# Altium PCB main.PcbDoc
Units mm, origin at the board's own origin, x right, y up, seen from the top; angles counter-clockwise.
Board outline 95.5 x 60.57 mm, 4 copper layers (Digital Signal, Vcc, Ground, Analog Signal), stack 0.603 mm thick; 11 components, 16 nets, 90 pads, 0 vias.
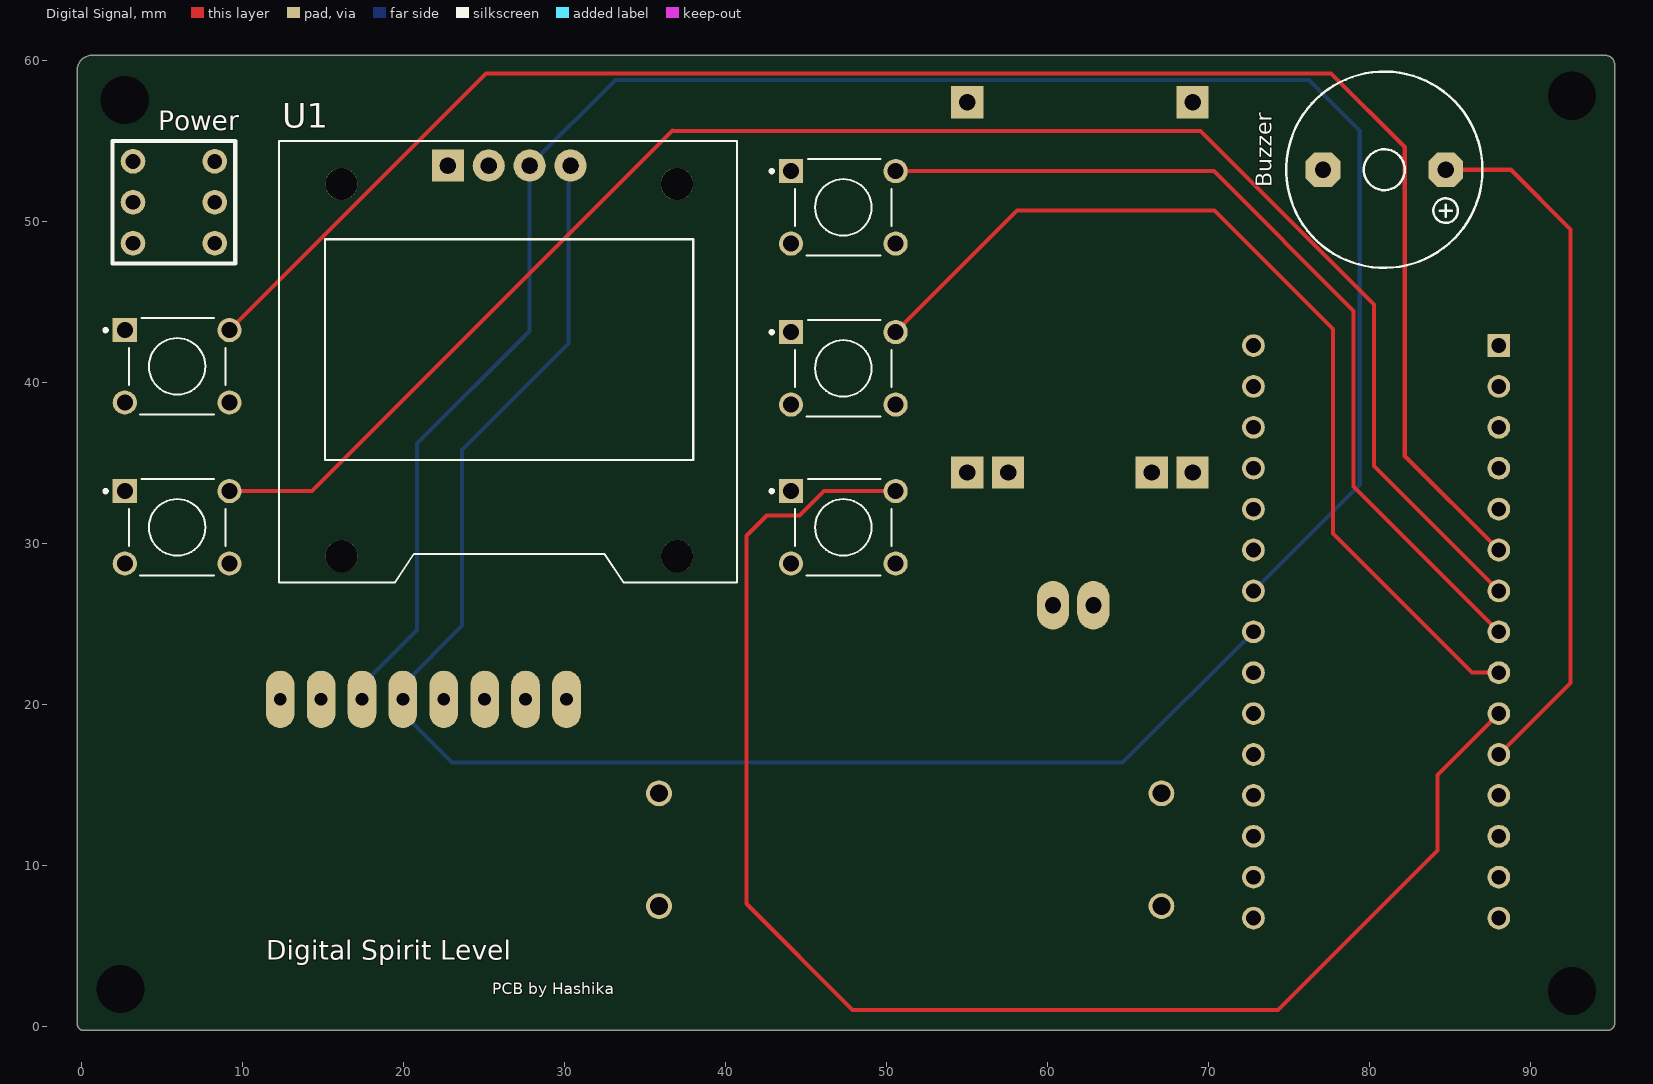
[diagram p0: Digital Signal view]
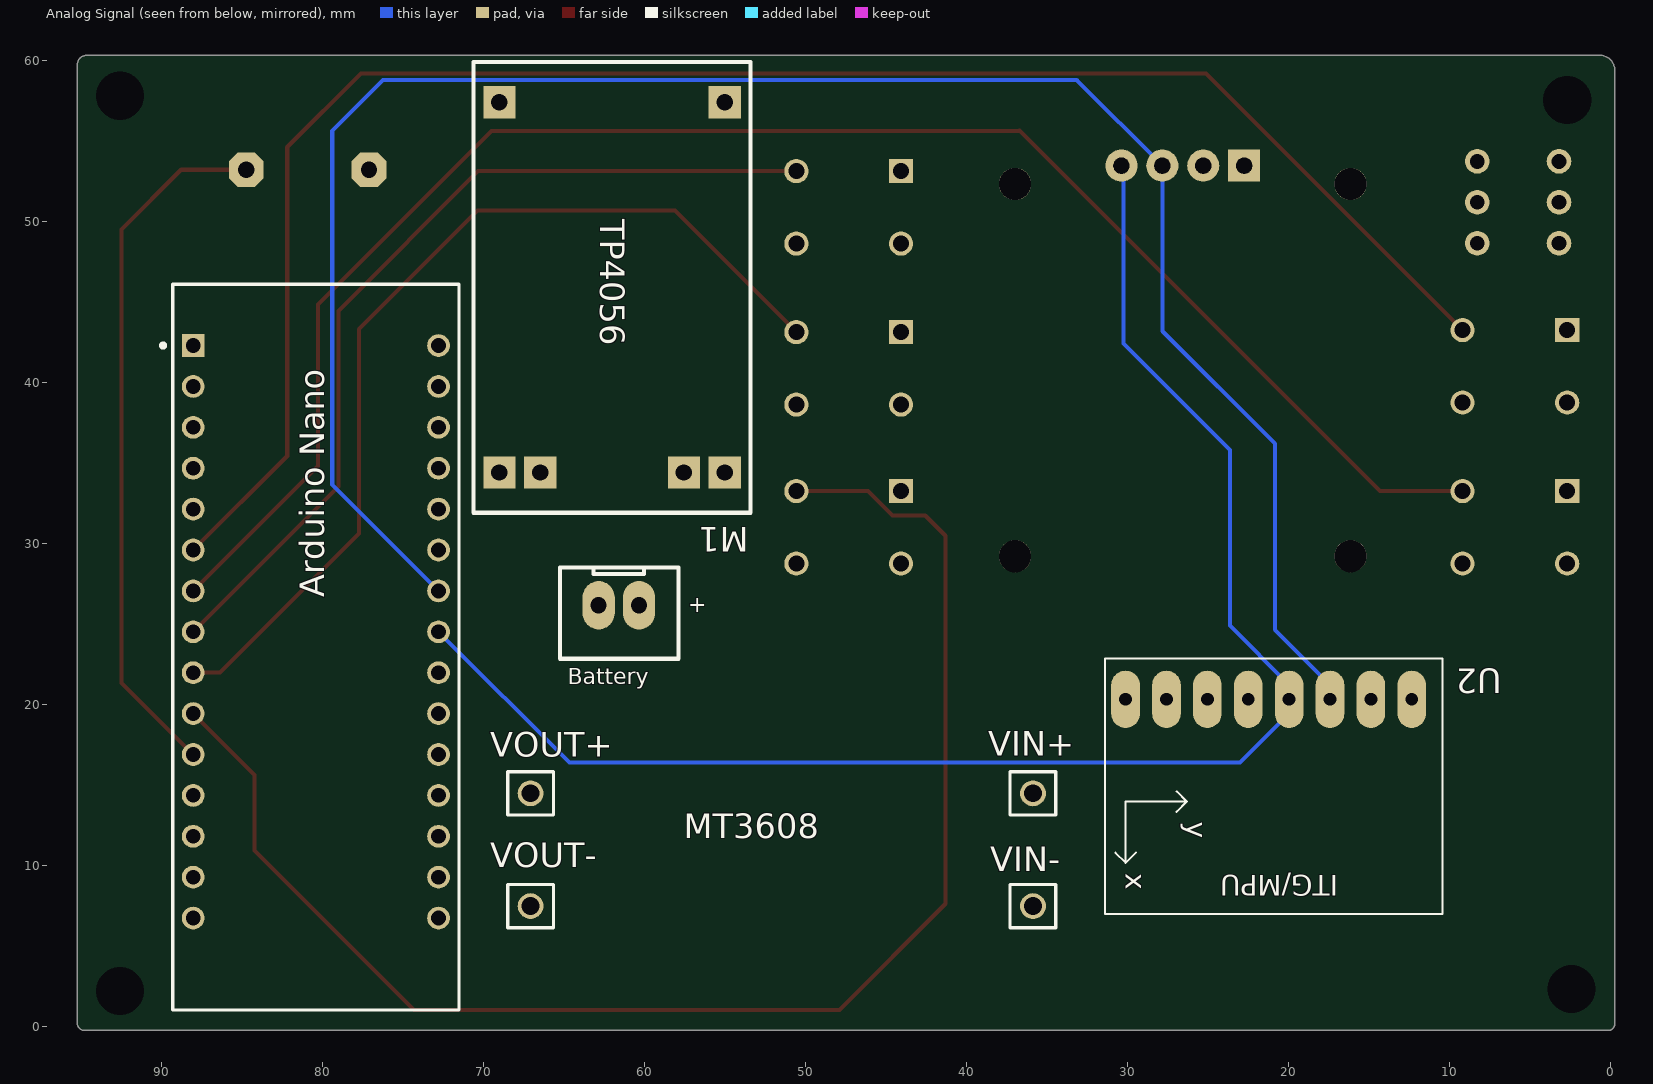
[diagram p1: Analog Signal view, seen from below]
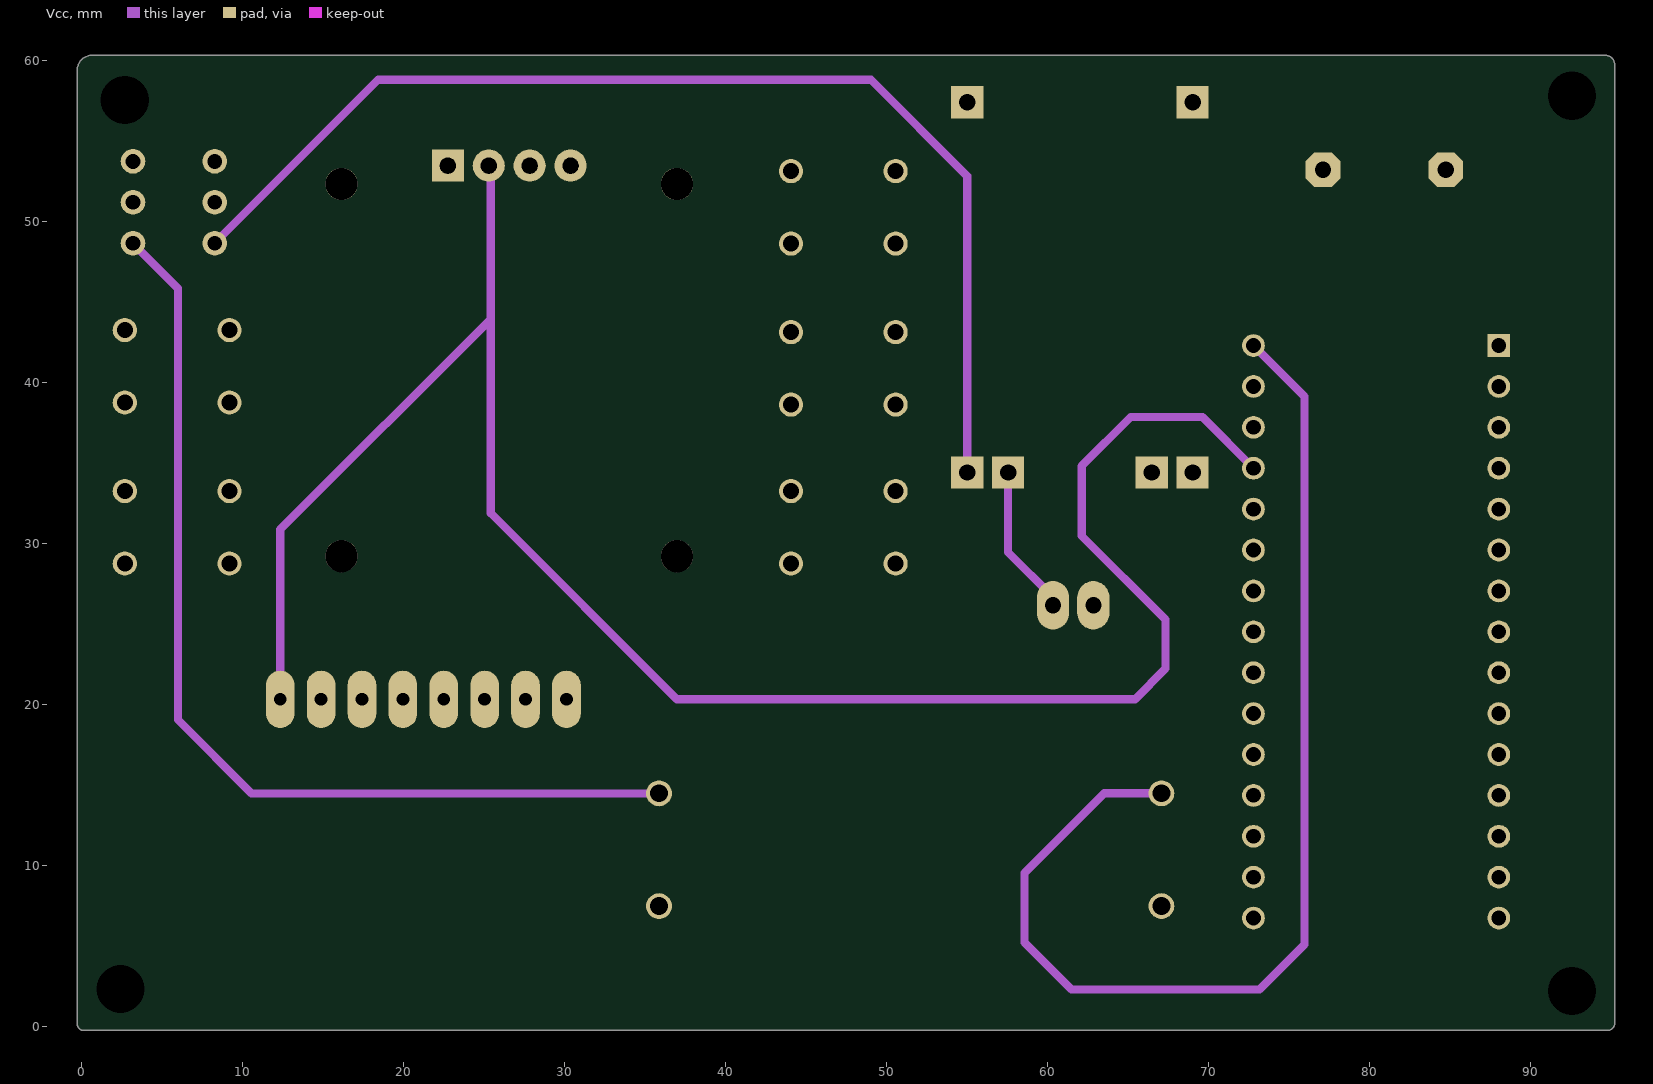
[diagram p2: Vcc]
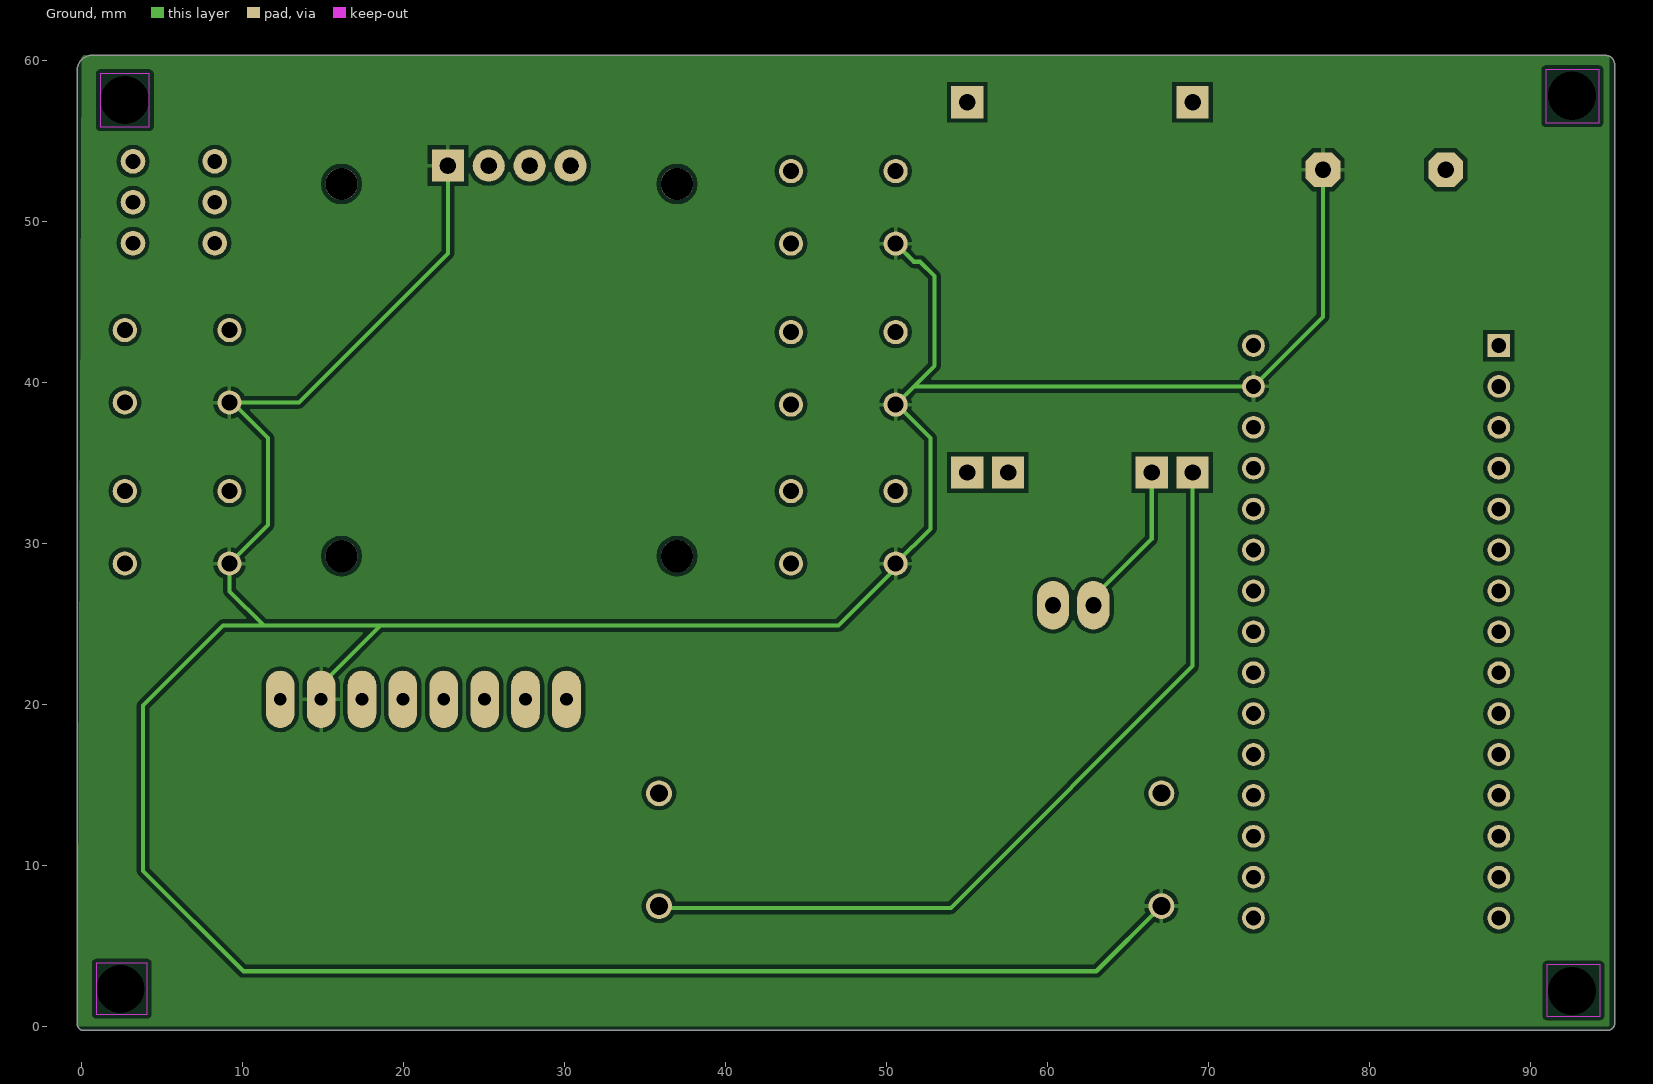
[diagram p3: Ground]
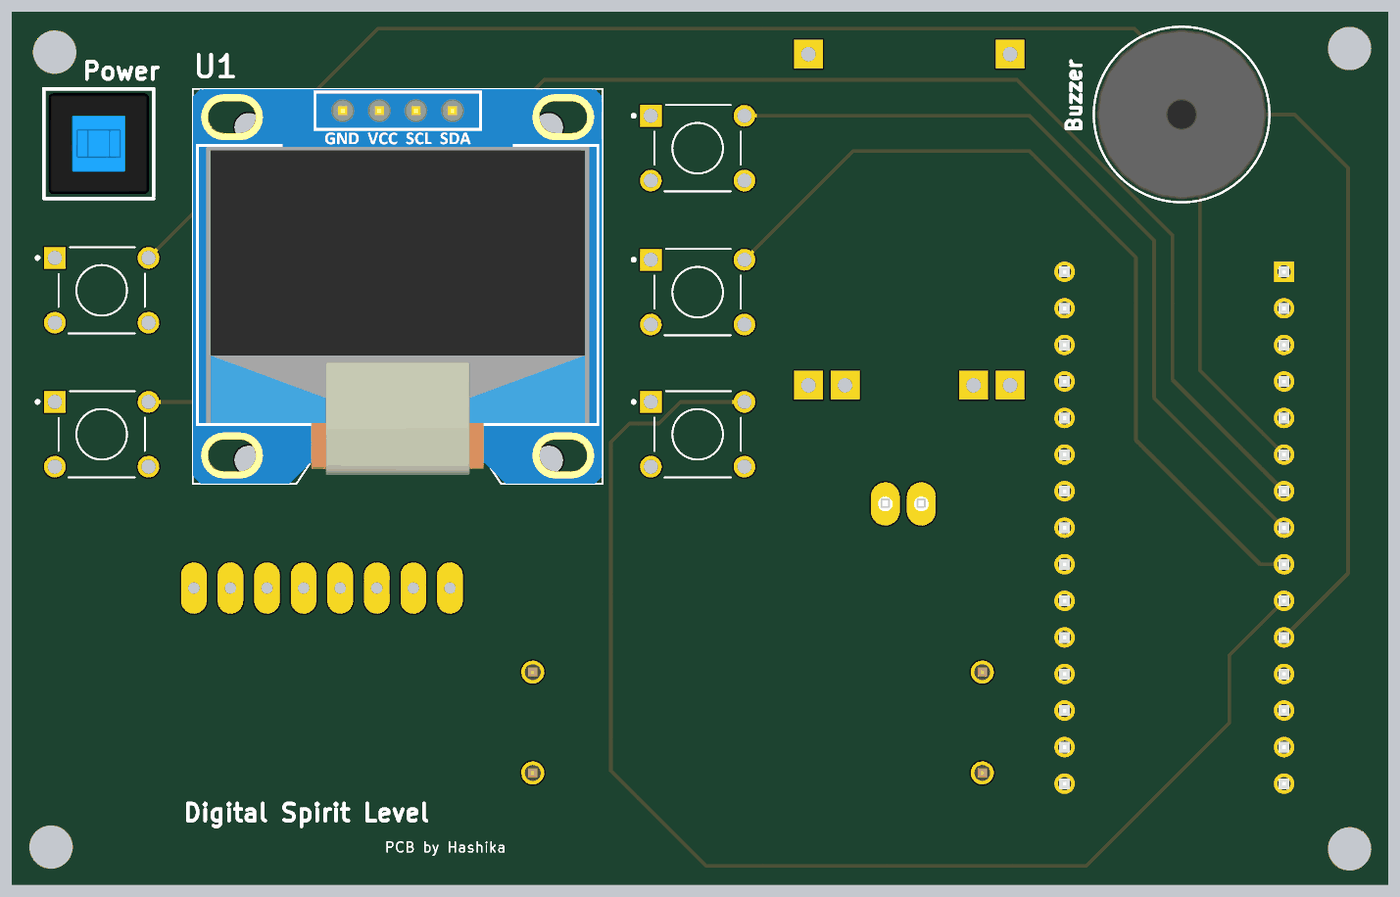
[diagram p4: 3D render of the assembled board from above, using the file's embedded part models]

## Layer stack, top to bottom
Top Solder: solder mask 0.0102, Solder Resist, Dk 3.5
Digital Signal: signal copper 0.0356
Dielectric 2: prepreg 0.0711, PP-006, Dk 4.1
Vcc: signal copper 0.035
Dielectric 1: dielectric 0.32, FR-4, Dk 4.8
Ground: signal copper 0.035
Dielectric 3: prepreg 0.0711, PP-006, Dk 4.1
Analog Signal: signal copper 0.0356
Bottom Solder: solder mask 0.0102, Solder Resist, Dk 3.5

## Board outline
0.122,-0.249 cw(c0.122,0.16) -0.287,0.16 -0.287,59.403 cw(c0.633,59.403) 0.633,60.323 94.617,60.323 cw(c94.617,59.726) 95.214,59.726 95.214,0.222 cw(c94.747,0.217) 94.752,-0.249

## Design rules (kind name [scope] priority, off if disabled: settings)
Clearance [All] p1: gap=0.254 ignorepadtopadclearanceinfootprint=FALSE except(0: Arc-Hole Track-Hole SMDPad-Hole THPad-Hole Via-Hole Fill-Hole Poly-Hole Region-Hole Text-Hole)
HoleSize [All] p1: absolutevalues=TRUE maxlimit=3.55 minlimit=0.025 maxpercent=80.000 minpercent=20.000
PolygonConnect [All] p1: connectstyle=Relief reliefconductorwidth=0.254 reliefentries=4 polygonreliefangle="90 Angle" airgapwidth=0.254
RoutingVias [All] p1: holewidth=0.711 width=1.27 viastyle="Through Hole" minholewidth=0.711 minwidth=1.27 maxholewidth=0.711 maxwidth=1.27
SilkToSolderMaskClearance [IsPad] p1: minsilkscreentomaskgap=0.237 clearancetoexposedcopper=TRUE
SolderMaskExpansion [All] p1: expansion=0.102 istentingtop=FALSE
Width [All] p1: maxlimit=0.508 minlimit=0.254 preferedwidth=0.508 toplayer_maxwidth=0.254 toplayer_prefwidth=0.254 midlayer1_minwidth=0.508 midlayer2_maxwidth=0.254 midlayer2_prefwidth=0.254 bottomlayer_maxwidth=0.254 bottomlayer_prefwidth=0.254 minimp=50.000000 maximp=50.000000 favimp=50.000000
28 further rules are at their usual default settings.

## Components (designator, comment, footprint, x,y, rotation, side; value= is the part's Value field where it differs from the comment)
"Arduino Nano" "A000005" FP-A000005-MFG 80.392,23.56 r180 bottom
Battery "JST_2" JST_2 57.831,22.855 r90 bottom (schematic designator J1)
Buzzer "Buzzer small" Buzzer 80.9,53.214 r180 top
M1 "TP4056Module" TP4056Module 70.592,59.905 r270 bottom
Power "BUTTON_6_8X8" BUTTON_6_8x8 9.526,55.001 r180 top
U1 "DISPLAY_OLED" DISPLAY_OLED 12.879,26.802 r0 top
U2 "GY-521" GY-521 21.209,11.43 r270 bottom
VIN+ "61300111121" 61300111121 35.849,14.476 r180 bottom
VIN- "61300111121" 61300111121 35.849,7.476 r180 bottom
VOUT+ "61300111121" 61300111121 67.057,14.479 r180 bottom
VOUT- "61300111121" 61300111121 67.057,7.479 r180 bottom

## Footprints (in the part's own frame and the unit in brackets; to place one, negate y for a bottom-side part, rotate by r counter-clockwise, add the part's x,y. Pads: shape width x height; smd on the part's side, far side on the other; paste and mask are expansions set on the pad)
61300111121 [mm] "Pin Header, pitch 2.54 mm, THT, Vertical, single row, 1p"
  round 1.6 hole 1.1: 1(0,0)
  silkscreen extent -1.42,-1.35 1.42,1.35, body extent -1.27,-1.27 1.27,1.27, height 8.57
BUTTON_6_8x8 [mil]
  round 60 hole 36: 1(50,50) 2(50,150) 3(50,250) 4(250,250) 5(250,150) 6(250,50)
  silkscreen extent 0,0 300,300, body extent 12,12 288,288, height 528
Buzzer [mil]
  oct 85x85 hole 40: +(-150,0) -(150,0)
  silkscreen extent -240,-240 240,240, body extent -232,-232 232,232, height 394
DISPLAY_OLED [mm]
  rect 2x2 hole 1: 1(9.856,26.666)
  round 2 hole 1: 2(12.396,26.666) 3(14.936,26.666) 4(17.476,26.666)
  round 2 hole 2 unplated: ""(3.252,2.409) ""(3.252,25.523) ""(24.08,2.409) ""(24.08,25.523)
  silkscreen extent -0.64,0.76 27.81,28.19, body extent -0.61,0.78 27.79,28.18, height 5.7
FP-A000005-MFG [mil]
  rect 55.67x55.67 hole 35.98 paste-39370.1 mask+0: 1(-300,737.5)
  round 55.67 hole 35.98 paste-39370.1 mask+0: 2(-300,637.5) 3(-300,537.5) 4(-300,437.5) 5(-300,337.5) 6(-300,237.5) 7(-300,137.5) 8(-300,37.5) 9(-300,-62.5) 10(-300,-162.5) 11(-300,-262.5) 12(-300,-362.5) 13(-300,-462.5) 14(-300,-562.5) 15(-300,-662.5) 16(300,-662.5) 17(300,-562.5) 18(300,-462.5) 19(300,-362.5) 20(300,-262.5) 21(300,-162.5) 22(300,-62.5) 23(300,37.5) 24(300,137.5) 25(300,237.5) 26(300,337.5) 27(300,437.5) 28(300,537.5) 29(300,637.5) 30(300,737.5)
  silkscreen extent -379,-888 350,888, body extent -354,-884 354,888, height 488
GY-521 [mil]
  oval 140x70 hole 31.5: ADO(-350,-250) GND(-350,250) INT(-350,-350) SCL(-350,150) SDA(-350,50) VCC(-350,350) XCL(-350,-150) XDA(-350,-50)
  silkscreen extent -450,-400 175,425
JST_2 [mm]
  oval 3x2 hole 1: 1(3.307,4.994) 2(3.307,2.494)
  silkscreen extent -0.02,0.04 5.66,7.41, body extent -0.02,0.04 5.73,7.44, height 7.05
TP4056Module [mm]
  rect 2x2 hole 1.016: 1(2.5,15.6) 2(2.5,1.6) 3(25.5,15.6) 4(25.5,13.06) 5(25.5,4.14) 6(25.5,1.6)
  silkscreen extent 0,0 28,17.2

## Part data
"Arduino Nano": library part CMP-189986-000002-1, "ARDUINO NANO ATMEGA328 EVAL BRD", Operating Supply Voltage=12V, Package Quantity=50, Core Architecture=AVR, Data Bus Width=8b, Evaluation Kit=Yes, Height=0.25inch, Interface=I2C, Length=7inch, Number of Bits=8, Packaging=Bulk, REACH SVHC="No SVHC", Series="AVR® ATmega", Weight=0.358383oz, Width=5inch
Buzzer: library part Buzzer, "5-12v small buzzer (12mm)"
M1: "TP4056 Module for managing battery charging"
U2: "Triple Axis Accelerometer Gyro Breakout", Package=Package, Availability="Not in stock", Check_prices=https://www.snapeda.com/parts/GY-521/GODREAM+FORDREAM+CO.%252C+LIMITED/view-part/?ref=eda, MF="GODREAM FORDREAM CO., LIMITED", MP=GY-521, Price=None, SnapEDA_Link=https://www.snapeda.com/parts/GY-521/GODREAM+FORDREAM+CO.%252C+LIMITED/view-part/?ref=snap
VIN+ VIN- VOUT+ VOUT-: library part CMP-1502-01058-1, "THT Vertical Pin Header WR-PHD, Pitch 2.54 mm, Single Row, 1 pins", Contact Resistance=20mOhm, Manufacturer="Wurth Elektronik", Operating Temperature=-40to105degC, Rated Current=3A, Withstanding Voltage=500VAC, Working Voltage=250VAC, Datasheet URL=https://katalog.we-online.de/em/datasheet/6130xx11121.pdf, Gender=Male, Manufacturer URL=http://www.we-online.de, Mounting Technology=THT, Orientation=Vertical, Package Reference=61300111121, Packaging=Bag, Part Number=61300111121, Pin Number=1, Pitch=2.54mm, Publisher=WurthElektronik, Row Number=Single

## Free pads (board coordinates)
  rect 1.498x1.498 / inner round 1.498 / far side rect 1.498x1.498 hole 0.99: 1(2.667,33.251) 1(2.667,43.251) 1(44.047,33.251) 1(44.047,43.124) 1(44.047,53.124)
  round 1.498 hole 0.99: 2(9.167,33.251) 2(9.167,43.251) 2(50.547,33.251) 2(50.547,43.124) 2(50.547,53.124) 3(2.667,28.751) 3(2.667,38.751) 3(44.047,28.751) 3(44.047,38.624) 3(44.047,48.624) 4(9.167,28.751) 4(9.167,38.751) 4(50.547,28.751) 4(50.547,38.624) 4(50.547,48.624)
  round 1.524 hole 3: 8(2.402,2.329) 8(2.655,57.547) 8(92.563,2.202) 8(92.563,57.801)

## Nets (pads, with @x,y where several pads share a name; then routed paths per layer and width w, separated by ;. In a path a pad name is that pad's centre, name@x,y a point inside that pad or via, vN(x,y) a via of type N, cw(c..) or ccw(c..) an arc to the next point about the centre after c; other vN are vias at no path point)
+5: "Arduino Nano.27" U1.2 U2.VCC | length 126.1
  Vcc w0.508: U2.VCC 12.319,30.861 25.4,43.942 ; U1.2 25.4,53.343 25.4,43.942 ; 72.772,34.672 69.599,37.846 65.151,37.846 62.103,34.798 62.103,30.48 67.31,25.273 67.31,22.225 65.405,20.32 36.957,20.32 25.4,31.877 25.4,43.942
GND: "Arduino Nano.29" Buzzer.- pad.4 U1.1 U2.GND VOUT-.1 | length 234.5
  Ground w0.254: pad.4@9.167,38.751 pad.4@9.36,38.751 ; pad.4@9.167,39.259 pad.4@9.414,39.259 ; U2.GND 14.859,21.209 18.542,24.892 ; U1.1 22.734,48.007 13.478,38.751 pad.4@9.36,38.751 ; pad.4@50.547,48.624 51.674,47.498 52.07,47.498 52.959,46.609 52.959,41.036 51.675,39.752 ; VOUT-.1 63.007,3.429 10.033,3.429 3.81,9.652 3.81,19.939 8.763,24.892 11.303,24.892 ; Buzzer.- 77.09,44.07 72.772,39.752 51.675,39.752 ; pad.4@9.36,38.751 11.557,36.554 11.557,31.141 9.167,28.751 9.167,27.028 11.303,24.892 ; 11.303,24.892 18.542,24.892 ; 18.542,24.892 46.99,24.892 50.547,28.449 50.547,28.751 52.705,30.909 52.705,36.554 50.635,38.624 50.547,38.624 51.675,39.752
"NetArduino Nano_6": "Arduino Nano.6" pad.2@9.167,43.251 | length 108.9
  Digital Signal w0.254: pad.2@9.167,43.251 25.098,59.182 77.6,59.182 82.17,54.611 82.17,35.434 88.012,29.592
"NetArduino Nano_7": "Arduino Nano.7" pad.2@9.167,33.251 | length 106.1
  Digital Signal w0.254: pad.2@9.167,33.251 14.285,33.251 36.681,55.648 36.703,55.626 69.472,55.626 80.265,44.832 80.265,34.799 88.012,27.052 ; pad.2@9.474,33.493 pad.2@9.625,33.644
"NetArduino Nano_8": "Arduino Nano.8" pad.2@50.547,53.124 | length 55.7
  Digital Signal w0.254: pad.2@50.547,53.124 70.32,53.124 78.994,44.45 78.994,33.531 88.012,24.512
"NetArduino Nano_9": "Arduino Nano.9" pad.2@50.547,43.124 | length 59.9
  Digital Signal w0.254: pad.2@50.547,43.124 58.096,50.673 70.358,50.673 77.724,43.307 77.724,30.607 86.359,21.972 88.012,21.972
"NetArduino Nano_10": "Arduino Nano.10" pad.2@50.547,33.251 | length 93.1
  Digital Signal w0.254: pad.2@50.547,33.251 46.084,33.251 44.58,31.747 42.542,31.747 41.275,30.48 41.275,7.62 47.879,1.016 74.295,1.016 84.201,10.922 84.201,15.621 88.012,19.432
"NetArduino Nano_11": "Arduino Nano.11" Buzzer.+ | length 43.7
  Digital Signal w0.254: Buzzer.+ 88.753,53.214 92.457,49.51 92.457,21.337 88.012,16.892
"NetArduino Nano_23": "Arduino Nano.23" U1.4 U2.SDA | length 95.8
  Analog Signal w0.254: U1.4 30.226,53.34 30.226,42.418 23.622,35.814 23.622,24.892 19.939,21.209 U2.SDA 19.939,19.431 22.987,16.383 64.643,16.383 72.772,24.512
"NetArduino Nano_24": "Arduino Nano.24" U1.3 U2.SCL | length 123.8
  Analog Signal w0.254: U2.SCL 17.399,21.209 20.828,24.638 20.828,36.195 27.814,43.181 U1.3 33.132,58.786 76.217,58.786 79.376,55.627 79.376,33.656 72.772,27.052
"NetArduino Nano_30": "Arduino Nano.30" VOUT+.1 | length 73.2
  Vcc w0.508: VOUT+.1 63.501,14.479 58.547,9.525 58.547,5.207 61.468,2.286 73.152,2.286 75.946,5.08 75.946,39.119 72.772,42.292
NetJ1_1: Battery.1 M1.5 | length 9.7
  Ground w0.254: Battery.1 62.825,26.662 66.452,30.289 M1.5
NetJ1_2: Battery.2 M1.4 | length 9.4
  Vcc w0.508: M1.4 57.532,29.455 60.325,26.662 Battery.2
NetM1_3: M1.3 Power.3 | length 71.8
  Vcc w0.508: Power.3 18.406,58.801 49.022,58.801 54.992,52.831 M1.3
NetM1_6: M1.6 VIN-.1 | length 51.7
  Ground w0.254: VIN-.1@35.849,7.695 VIN-.1 35.959,7.366 53.975,7.366 68.992,22.383 M1.6
NetPower_4: Power.4 VIN+.1 | length 62.5
  Vcc w0.508: Power.4 3.176,48.64 5.969,45.847 5.969,19.05 10.543,14.476 VIN+.1
pads on no net: "Arduino Nano.1" "Arduino Nano.2" "Arduino Nano.3" "Arduino Nano.4" "Arduino Nano.5" "Arduino Nano.12" "Arduino Nano.13" "Arduino Nano.14" "Arduino Nano.15" "Arduino Nano.16" "Arduino Nano.17" "Arduino Nano.18" "Arduino Nano.19" "Arduino Nano.20" "Arduino Nano.21" "Arduino Nano.22" "Arduino Nano.25" "Arduino Nano.26" "Arduino Nano.28" M1.1 M1.2 Power.1 Power.2 Power.5 Power.6 U1. U2.ADO U2.INT U2.XCL U2.XDA

## Polygon pours and split planes (outlines as drawn)
GND on Ground "Top_layer" (solid, remove dead copper, pour order 0): 0,60.198 0.127,60.325 94.869,60.325 94.869,-0.127 94.742,0 -0.254,0

## Keep-outs
Ground:
  rectangle: 0.89,0.763 4.065,3.938
  rectangle: 90.997,0.644 94.299,3.819
  rectangle: 90.933,56.135 94.235,59.437
  rectangle: 1.144,55.881 4.192,59.183

## Silkscreen, mask and mechanical layers (free items; w line width, h text height)
Top Overlay:
  circle w0.2: c42.852,33.251 r0.1
  circle w0.127: c47.297,31.001 r1.755
  circle w0.127: c47.297,40.874 r1.755
  circle w0.2: c42.852,43.124 r0.1
  circle w0.127: c47.297,50.874 r1.755
  circle w0.2: c42.852,53.124 r0.1
  circle w0.127: c5.917,31.001 r1.755
  circle w0.2: c1.472,33.251 r0.1
  circle w0.127: c5.917,41.001 r1.755
  circle w0.2: c1.472,43.251 r0.1
  lines w0.127: 2.922,29.851 2.922,32.151 ; 2.922,39.851 2.922,42.151 ; 3.617,28.006 8.217,28.006 ; 3.617,38.006 8.217,38.006 ; 3.717,33.996 8.217,33.996 ; 3.717,43.996 8.217,43.996 ; 8.917,29.851 8.917,32.151 ; 8.917,39.851 8.917,42.151 ; 44.302,29.851 44.302,32.151 ; 44.302,39.724 44.302,42.024 ; 44.302,49.724 44.302,52.024 ; 44.997,28.006 49.597,28.006 ; 44.997,37.879 49.597,37.879 ; 44.997,47.879 49.597,47.879 ; 45.097,33.996 49.597,33.996 ; 45.097,43.869 49.597,43.869 ; 45.097,53.869 49.597,53.869 ; 50.297,29.851 50.297,32.151 ; 50.297,39.724 50.297,42.024 ; 50.297,49.724 50.297,52.024
  text "Digital Spirit Level" at 11.449,4.146 h1.2
  text "PCB by Hashika" at 25.5,1.984 h0.7
Bottom Overlay:
  text "+" at 57.277,25.741 h1
  text "MT3608" at 57.532,11.685 h1.52
Mechanical 1:
  lines w0.5: -0.127,-0.127 -0.127,0 -0.127,60.325 0,60.452 94.996,60.452 94.996,-0.127 -0.127,-0.127
Top 3D Body:
  circle w0.127: c47.297,31.001 r1.755
  circle w0.127: c47.297,40.874 r1.755
  circle w0.127: c47.297,50.874 r1.755
  circle w0.127: c5.917,31.001 r1.755
  circle w0.127: c5.917,41.001 r1.755
  lines w0.127: 2.922,28.006 2.922,33.996 8.912,33.996 8.912,28.006 2.922,28.006 ; 2.922,38.006 2.922,43.996 8.912,43.996 8.912,38.006 2.922,38.006 ; 44.302,28.006 50.292,28.006 50.292,33.996 44.302,33.996 44.302,28.006 ; 44.302,37.879 44.302,43.869 50.292,43.869 50.292,37.879 44.302,37.879 ; 44.302,47.879 44.302,53.869 50.292,53.869 50.292,47.879 44.302,47.879
Top Courtyard:
  lines w0.05: 1.667,27.751 1.667,34.251 10.167,34.251 10.167,27.751 1.667,27.751 ; 1.667,37.751 1.667,44.251 10.167,44.251 10.167,37.751 1.667,37.751 ; 43.047,27.751 51.547,27.751 51.547,34.251 43.047,34.251 43.047,27.751 ; 43.047,37.624 43.047,44.124 51.547,44.124 51.547,37.624 43.047,37.624 ; 43.047,47.624 43.047,54.124 51.547,54.124 51.547,47.624 43.047,47.624

## Text inside footprints (layer, text, board x,y; h text height)
M1: Bottom Overlay "TP4056" at 62.718,50.126 h1.52 r90
U2: Bottom Overlay "x" at 30.099,9.525 h1.27 r90; Bottom Overlay "y" at 26.289,12.7 h1.27 r90; Bottom Overlay "ITG/MPU" at 16.891,9.398 h1.27 r180